# Altium PCB L50T-TEST.PcbDoc (part 2 of 2)
Units mm, origin at the board's own origin, x right, y up, seen from the top; angles counter-clockwise.
Board outline 174.25 x 233.6 mm, 2 copper layers (Top Layer, Bottom Layer); 176 components, 146 nets, 565 pads, 293 vias.
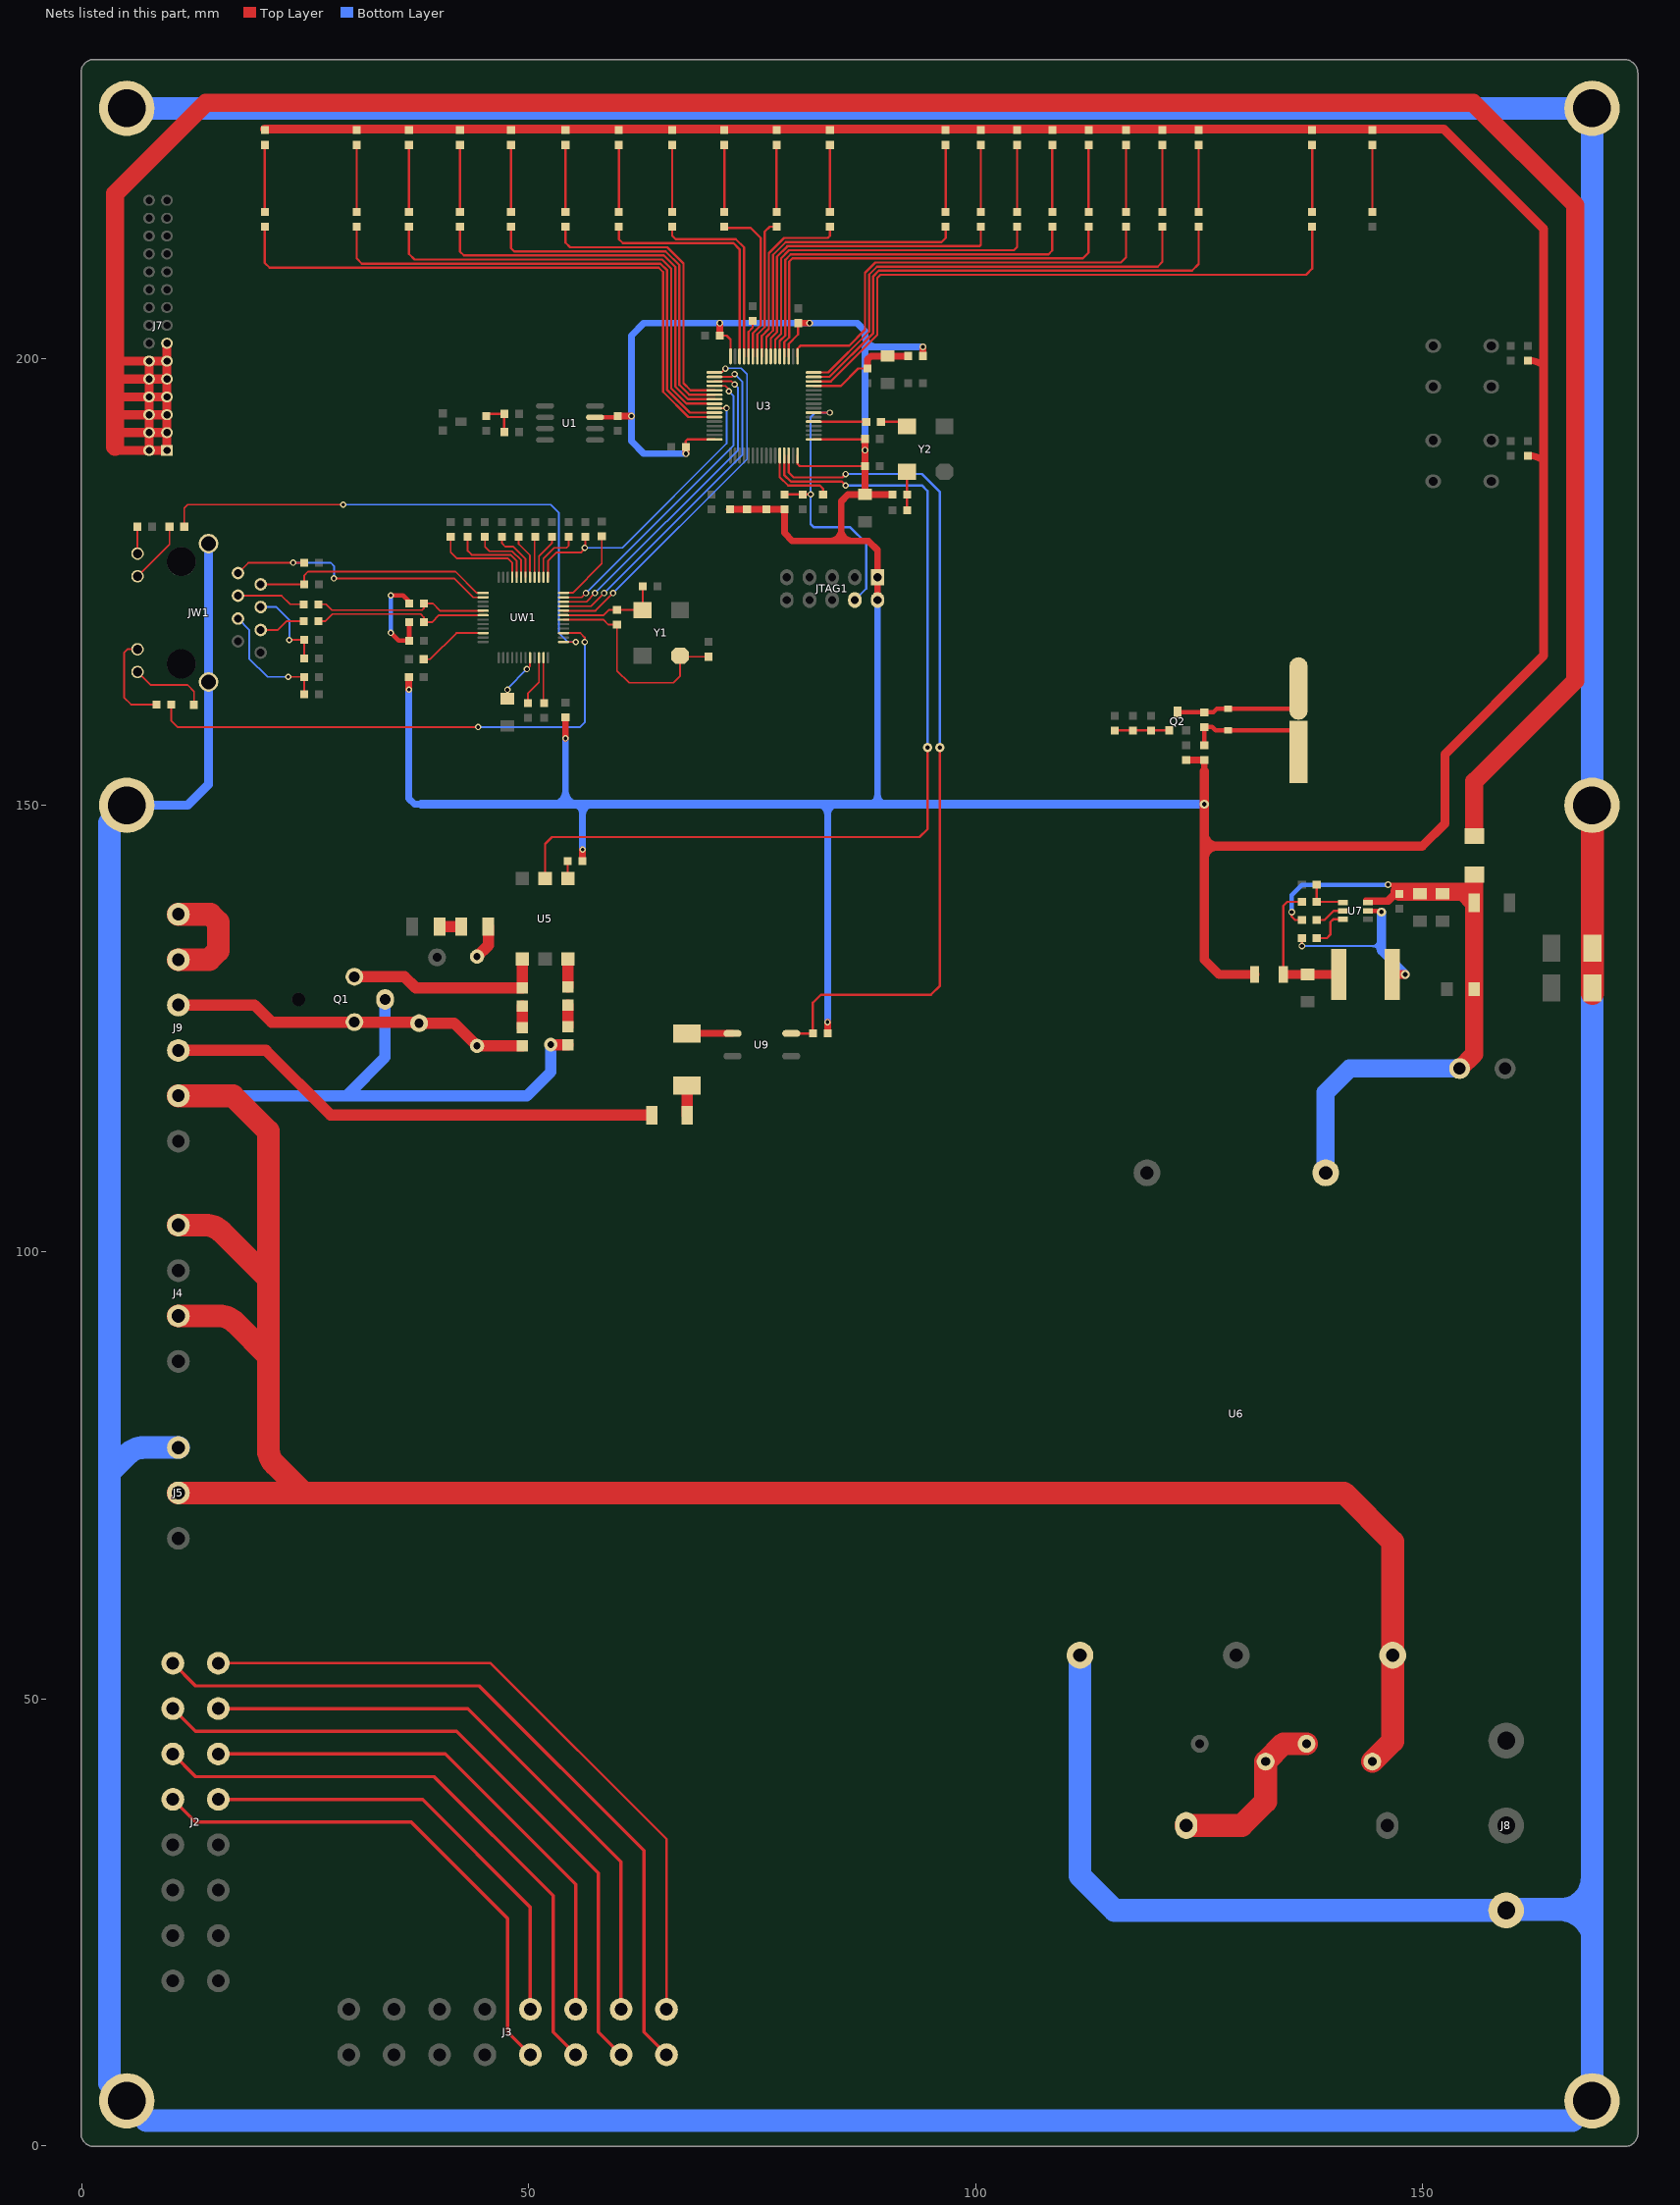
[diagram p2: the nets of this part, all layers, seen from the top]

## Via types
v1: diameter 0.762, hole 0.457, Top Layer to Bottom Layer, tented both sides, 242 vias
v2: diameter 0.711, hole 0.406, Top Layer to Bottom Layer, tented both sides, 44 vias
v3: diameter 1.016, hole 0.508, Top Layer to Bottom Layer, tented both sides, 5 vias
v4: diameter 1.524, hole 0.762, Top Layer to Bottom Layer, tented both sides, 2 vias

## Nets (pads, with @x,y where several pads share a name; then routed paths per layer and width w, separated by ;. In a path a pad name is that pad's centre, name@x,y a point inside that pad or via, vN(x,y) a via of type N, cw(c..) or ccw(c..) an arc to the next point about the centre after c; other vN are vias at no path point) (continued)
L5A: J2.10 J3.8 | length 59.3
  Top Layer w0.381: J2.10@10.16,38.735 12.7,36.195 36.83,36.195 47.625,25.4 47.625,12.7 J3.8@50.165,10.16
L5B: J2.9 J3.7 | length 51.4
  Top Layer w0.381: J2.9@15.24,38.735 38.1,38.735 50.165,26.67 J3.7@50.165,15.24
L6A: J2.12 J3.6 | length 68
  Top Layer w0.381: J2.12@10.16,43.815 12.7,41.275 39.37,41.275 52.705,27.94 52.705,12.7 J3.6@55.245,10.16
L6B: J2.11 J3.5 | length 60
  Top Layer w0.381: J2.11@15.24,43.815 40.64,43.815 55.245,29.21 J3.5@55.245,15.24
L7A: J2.14 J3.4 | length 76.6
  Top Layer w0.381: J2.14@10.16,48.895 12.7,46.355 41.91,46.355 57.785,30.48 57.785,12.7 J3.4@60.325,10.16
L7B: J2.13 J3.3 | length 68.7
  Top Layer w0.381: J2.13@15.24,48.895 43.18,48.895 60.325,31.75 J3.3@60.325,15.24
L8A: J2.16 J3.2 | length 85.3
  Top Layer w0.381: J2.16@10.16,53.975 12.7,51.435 44.45,51.435 62.865,33.02 62.865,12.7 J3.2@65.405,10.16
L8B: J2.15 J3.1 | length 77.4
  Top Layer w0.254: J2.15@15.24,53.975 45.72,53.975 65.405,34.29 J3.1@65.405,15.24
LED1: R11.1 U3.42 | length 58.6
  Top Layer w0.254: R11.1@30.734,214.757 30.734,211.201 31.318,210.617 64.731,210.617 65.481,209.866 65.481,196.473 68.014,193.941 U3.42@70.777,193.941
LED2: R12.1 U3.40 | length 52
  Top Layer w0.254: R12.1@36.576,214.757 36.576,211.709 37.211,211.074 64.92,211.074 65.938,210.056 65.938,196.663 67.66,194.941 U3.40@70.777,194.941
LED3: R13.1 U3.39 | length 46
  Top Layer w0.254: R13.1@42.291,214.757 42.291,211.963 42.723,211.531 65.11,211.531 66.396,210.245 66.396,196.852 67.807,195.441 U3.39@70.777,195.441
LED4: R14.1 U3.38 | length 39.8
  Top Layer w0.254: R14.1@48.006,214.757 48.006,212.344 48.362,211.988 65.299,211.988 66.853,210.435 66.853,197.042 67.953,195.941 U3.38@70.777,195.941
LED5: R15.1 U3.37 | length 33.1
  Top Layer w0.254: R15.1@54.102,214.757 54.102,212.979 54.635,212.446 65.488,212.446 67.31,210.624 67.31,197.231 68.1,196.441 U3.37@70.777,196.441
LED6: R16.1 U3.30 | length 27.4
  Top Layer w0.254: R16.1@60.071,214.757 60.071,213.36 60.528,212.903 72.898,212.903 73.577,212.224 U3.30@73.577,200.241
LED7: R17.1 U3.29 | length 21.8
  Top Layer w0.254: R17.1@66.04,214.757 66.04,213.741 66.421,213.36 73.152,213.36 74.077,212.435 U3.29@74.077,200.241
LED8: R18.1 U3.27 | length 18.2
  Top Layer w0.254: R18.1@71.882,214.757 72.009,214.63 74.803,214.63 75.946,213.487 75.946,203.708 75.077,202.839 U3.27@75.077,200.241
LED9: R19.1 U3.26 | length 15.9
  Top Layer w0.254: U3.26@75.577,200.241 75.577,202.692 76.403,203.519 76.403,214.198 76.962,214.757 R19.1@77.724,214.757
LED10: R20.1 U3.25 | length 20.5
  Top Layer w0.254: U3.25@76.077,200.241 76.077,202.546 76.86,203.329 76.86,211.792 78.555,213.487 83.439,213.487 83.693,213.741 R20.1@83.693,214.757
LED_COU: R24.1 U3.23 | length 36.8
  Top Layer w0.254: U3.23@77.077,200.241 77.077,202.253 77.775,202.95 77.775,211.414 78.934,212.573 100.432,212.573 100.584,212.725 R24.1@100.584,214.757
LED_CPU: R23.1 U3.24 | length 33
  Top Layer w0.254: U3.24@76.577,200.241 76.577,202.399 77.318,203.14 77.318,211.603 78.744,213.03 96.19,213.03 96.647,213.487 R23.1@96.647,214.757
LED_DET: R27.1 U3.20 | length 47.7
  Top Layer w0.254: U3.20@78.577,200.241 78.577,201.813 79.146,202.382 79.146,210.845 79.502,211.201 112.014,211.201 112.649,211.836 R27.1@112.649,214.757
LED_IOU: R28.1 U3.17 | length 49.2
  Top Layer w0.254: U3.17@80.077,200.241 80.077,201.108 80.391,201.422 85.84,201.422 87.63,203.212 87.63,209.585 88.789,210.744 116.256,210.744 116.84,211.328 R28.1@116.84,214.757 R28.1@116.713,214.63
LED_MAU: R29.1 U3.16 | length 51.8
  Top Layer w0.254: U3.16@81.877,198.441 83.506,198.441 88.087,203.022 88.087,209.395 88.978,210.287 120.371,210.287 120.904,210.82 R29.1@120.904,214.757
LED_MFU: R30.1 U3.15 | length 56.2
  Top Layer w0.254: U3.15@81.877,197.941 83.653,197.941 88.544,202.833 88.544,209.206 89.168,209.829 124.231,209.829 124.968,210.566 R30.1@124.968,214.757
LED_OK: R38.1 U3.43 | length 69.6
  Top Layer w0.254: R38.1@20.32,214.63 R38.1@20.447,214.757 20.447,210.693 20.98,210.16 64.541,210.16 65.024,209.677 65.024,196.284 67.867,193.441 U3.43@70.777,193.441
LED_PDU: R26.1 U3.21 | length 44
  Top Layer w0.254: U3.21@78.077,200.241 78.077,201.96 78.689,202.572 78.689,211.035 79.313,211.658 108.153,211.658 108.585,212.09 R26.1@108.585,214.757
LED_RUN: R37.1 U3.14 | length 69.4
  Top Layer w0.254: U3.14@81.877,197.441 83.799,197.441 89.002,202.643 89.002,209.017 89.357,209.372 136.982,209.372 137.668,210.058 R37.1@137.668,214.757
LED_SSU: R25.1 U3.22 | length 40.5
  Top Layer w0.254: U3.22@77.577,200.241 77.577,202.106 78.232,202.761 78.232,211.224 79.123,212.115 104.292,212.115 104.648,212.471 R25.1@104.648,214.757
MFU_Control: U3.61 U5.2 | length 104.2
  Top Layer w0.254: U5.2@51.816,141.787 51.816,145.669 52.578,146.431 93.726,146.431 94.615,147.32 v3(94.615,156.464) ; U3.61@78.577,189.141 78.577,186.98 79.324,186.233 85.039,186.233 v2(85.471,185.801)
  Bottom Layer w0.254: v2(85.471,185.801) 93.98,185.801 94.615,185.166 v3(94.615,156.464)
MFU_EN: C12.2 J9.4 Q1.1 R35.2 RV1.2 | length 40.4
  Top Layer w1.27: J9.4@10.77,127.635 19.304,127.635 21.209,125.73 Q1.1@30.48,125.73 37.592,125.73 RV1.2@37.719,125.603 41.656,125.603 C12.2@44.196,123.063 R35.2@49.276,123.063
MFU_WORK: D6.2 J9.3 | length 56
  Top Layer w1.27: J9.3@10.77,122.555 20.574,122.555 27.813,115.316 D6.2@63.754,115.316
MFU_WORK_C: R42.2 U3.62 U9.4 | length 96.2
  Top Layer w0.254: U3.62@79.077,189.141 79.077,187.242 79.629,186.69 85.09,186.69 v2(85.471,187.071) ; U9.4@79.375,124.46 R42.2@81.788,124.46 81.788,127.889 82.677,128.778 94.996,128.778 96.012,129.794 v3(96.012,156.464)
  Bottom Layer w0.254: v2(85.471,187.071) 93.98,187.071 96.012,185.039 v3(96.012,156.464)
nACTLED: RW16.2 UW1.27 | length 60.7
  Top Layer w0.203: RW16.2@9.957,161.265 9.957,159.461 10.668,158.75 v2(44.323,158.75) ; UW1.27@53.882,169.272 55.772,169.272 56.261,168.783 v2(56.261,168.275)
  Bottom Layer w0.203: v2(44.323,158.75) 55.753,158.75 56.261,159.258 v2(56.261,168.275)
NET0_LED1: JW1.11 RW16.1 | length 10.6
  Top Layer w0.203: JW1.11@6.2,167.456 5.074,167.456 4.699,167.081 4.699,162.052 5.486,161.265 RW16.1@8.306,161.265
NET0_LED2: JW1.10 RW17.1 | length 7
  Top Layer w0.203: JW1.10@6.2,175.626 9.779,179.205 RW17.1@9.779,181.178
NET_MISO: U3.35 UW1.34 | length 36.6
  Top Layer w0.203: UW1.34@53.882,172.772 56.44,172.772 v2(57.404,173.736) ; U3.35@70.777,197.441 72.688,197.441 v2(73.025,197.104)
  Bottom Layer w0.203: v2(57.404,173.736) 73.406,189.738 73.406,196.723 v2(73.025,197.104) v2@73.025,196.977
NET_MOSI: U3.36 UW1.35 | length 34.3
  Top Layer w0.203: UW1.35@53.882,173.272 55.924,173.272 v2(56.388,173.736) ; U3.36@70.777,196.941 72.009,196.941 72.39,196.56 v2(72.39,196.342)
  Bottom Layer w0.203: v2(56.388,173.736) 72.898,190.246 72.898,195.834 v2(72.39,196.342)
NET_NSCLK: U3.34 UW1.33 | length 38.8
  Top Layer w0.203: UW1.33@53.882,172.272 56.956,172.272 v2(58.42,173.736) ; U3.34@70.777,197.941 72.719,197.941 v2(73.025,198.247)
  Bottom Layer w0.203: v2(58.42,173.736) 73.914,189.23 73.914,197.358 v2(73.025,198.247)
NET_NSS: U3.33 UW1.32 | length 41.2
  Top Layer w0.203: UW1.32@53.882,171.772 57.472,171.772 v2(59.436,173.736) ; U3.33@70.777,198.441 71.568,198.441 v2(72.009,198.882)
  Bottom Layer w0.203: v2(59.436,173.736) 74.422,188.722 74.422,198.247 73.762,198.907 72.034,198.907 v2(72.009,198.882)
NetC2_2: C2.2 R3.2 R4.1 | length 4.2
  Top Layer w0.254: C2.2@45.212,193.548 45.466,193.802 R4.1@47.244,193.802 R3.2@47.244,191.77
NetC10_1: C10.1 FB5.1 Y2.4 | length 4.3
  Top Layer w0.254: C10.1@92.329,183.007 FB5.1@92.329,184.785 Y2.4@92.329,187.325
NetC12_1: C12.1 R33.2 | length 3.9
  Top Layer w1.27: C12.1@44.196,133.063 45.466,134.333 R33.2@45.466,136.398
NetC17_2: C17.2 Q2.1 R36.2 R41.2 | length 6.1
  Top Layer w0.254: R36.2@115.568,158.369 R41.2@117.6,158.369 C17.2@119.632,158.369 Q2.1@121.664,158.369
NetC18_1: C18.1 D3.2 R40.1 U8.1 | length 14.8
  Top Layer w0.508: R40.1@125.601,156.718 C18.1@125.601,158.75 126.492,158.75 126.873,158.369 D3.2@128.27,158.369 135.509,158.369 136.144,157.734 U8.1@136.144,155.956
NetC18_2: C18.2 D3.1 Q2.3 U8.2 | length 15.6
  Top Layer w0.508: Q2.3@122.604,160.401 C18.2@125.601,160.401 126.619,160.401 127,160.782 D3.1@128.27,160.782 135.509,160.782 136.144,161.417 U8.2@136.144,163.068
NetC19_1: C19.1 L1.1 U7.2 | length 22.9
  Top Layer w0.254: v1(136.525,134.239) C19.1@136.525,135.128
  Top Layer w0.508: U7.2@143.894,138.176 145.288,138.176 v3(145.415,138.049)
  Top Layer w1.016: L1.1@146.637,131.064 v3(148.082,131.064)
  Bottom Layer w0.254: v1(136.525,134.239) 144.399,134.239 ; 145.034,133.731 ccw(c144.494,133.699) 144.526,134.239 ; 145.034,134.747 cw(c144.463,134.811) 144.526,134.239 ; 145.415,133.731 144.907,134.239 144.526,134.239 ; 144.399,134.239 ccw(c144.463,134.811) 144.526,134.239 ; 144.399,134.239 144.463,134.239 ; 144.463,134.239 cw(c144.494,133.699) 144.526,134.239 ; 144.463,134.239 144.526,134.239
  Bottom Layer w1.016: v3(145.415,138.049) 145.415,133.731 v3(148.082,131.064)
NetC19_2: C19.2 U7.6 | length 4.6
  Top Layer w0.254: C19.2@138.176,135.128 139.319,135.128 139.7,135.509 139.7,136.906 140.02,137.226 U7.6@141.094,137.226
NetC22_2: C22.2 F2.1 L1.2 R43.1 | length 16.2
  Top Layer w0.254: F2.1@134.442,131.064 134.442,138.76 134.874,139.192 R43.1@136.525,139.192
  Top Layer w1.016: F2.1@134.442,131.064 C22.2@137.16,131.064 L1.2@140.637,131.064
NetCW1_1: CW1.1 UW1.20 | length 5.6
  Top Layer w0.203: CW1.1@47.6,161.925 v2(47.6,162.916) ; v2(49.784,165.227) 50.132,165.575 UW1.20@50.132,166.522
  Bottom Layer w0.203: v2(47.6,162.916) 47.6,163.043 v2(49.784,165.227)
NetCW2_1: CW2.1 UW1.22 | length 5.6
  Top Layer w0.203: CW2.1@49.911,161.417 49.911,162.56 51.132,163.781 UW1.22@51.132,166.522
NetCW3_2: CW3.2 RW10.2 UW1.30 Y1.1 | length 24.8
  Top Layer w0.178: Y1.1@66.929,166.751 67.056,166.624 CW3.2@70.104,166.624
  Top Layer w0.203: UW1.30@53.882,170.772 58.336,170.772 58.903,170.205 RW10.2@59.868,170.205 59.868,165.049 61.214,163.703 66.167,163.703 66.929,164.465 Y1.1@66.929,166.751
NetCW4_2: CW4.2 RW10.1 UW1.31 Y1.3 | length 11.8
  Top Layer w0.203: UW1.31@53.882,171.272 58.369,171.272 58.953,171.856 RW10.1@59.868,171.856 Y1.3@62.704,171.856 ; Y1.3@62.729,171.831 Y1.3@62.704,171.856 ; CW4.2@62.738,174.498 62.738,171.891 Y1.3@62.704,171.856
NetCW5_1: CW5.1 RW15.1 RW19.1 | length 11.2
  Top Layer w0.508: v2(34.544,169.291) 35.408,168.427 CW5.1@36.601,168.427 RW15.1@36.601,170.485 ; v2(34.544,173.482) 35.941,173.482 36.601,172.822 RW19.1@36.601,172.593
  Bottom Layer w0.508: v2(34.544,169.291) v2(34.544,173.482)
NetCW6_1: CW6.1 JW1.3 | length 7.8
  Top Layer w0.203: JW1.3@17.45,173.451 22.332,173.451 23.292,172.491 CW6.1@24.816,172.491
NetCW7_1: CW7.1 JW1.6 | length 5.2
  Top Layer w0.203: JW1.6@19.99,169.621 21.895,169.621 22.885,170.612 CW7.1@24.816,170.612
NetCW8_1: CW8.1 JW1.5 RW22.2 | length 13.9
  Top Layer w0.203: v2(23.063,164.363) CW8.1@24.841,164.363 RW22.2@24.841,162.433
  Bottom Layer w0.203: JW1.5@17.45,170.891 18.694,169.647 18.694,166.421 20.752,164.363 v2(23.063,164.363)
NetCW9_1: CW9.1 JW1.4 RW20.2 | length 9.8
  Top Layer w0.203: v2(23.19,168.504) RW20.2@24.841,168.504 CW9.1@24.841,166.421
  Bottom Layer w0.203: JW1.4@19.99,172.181 21.748,172.181 23.19,170.739 v2(23.19,168.504)
NetD6_1: D6.1 R45.1 | length 3.3
  Top Layer w1.27: R45.1@67.691,118.618 67.714,118.595 D6.1@67.714,115.316
NetF1_2: F1.2 RT1.1 RV2.2 | length 19.9
  Top Layer w2.54: F1.2@123.571,35.814 129.794,35.814 132.461,38.481 RV2.2@132.461,42.958 134.461,44.958 RT1.1@137.033,44.958
NetJ9_5: J9.5 J9.6 | length 12.9
  Top Layer w2.54: J9.5@10.77,132.715 14.224,132.715 15.24,133.731 15.24,136.906 14.351,137.795 J9.6@10.77,137.795
NetJW1_9: JW1.9 RW23.2 | length 3
  Top Layer w0.203: RW23.2@6.198,181.178 6.2,181.176 JW1.9@6.2,178.166
NetJW1_12: JW1.12 RW21.2 | length 8.7
  Top Layer w0.203: JW1.12@6.2,164.916 7.642,163.474 11.786,163.474 12.522,162.738 RW21.2@12.522,161.239
NetLED1_2: LED1.2 R11.2 | length 7.5
  Top Layer w0.254: R11.2@30.734,216.408 LED1.2@30.734,223.901
NetLED2_2: LED2.2 R12.2 | length 7.5
  Top Layer w0.254: R12.2@36.576,216.408 LED2.2@36.576,223.901
NetLED3_2: LED3.2 R13.2 | length 7.5
  Top Layer w0.254: R13.2@42.291,216.408 LED3.2@42.291,223.901
NetLED4_2: LED4.2 R14.2 | length 7.5
  Top Layer w0.254: R14.2@48.006,216.408 LED4.2@48.006,223.901
NetLED5_2: LED5.2 R15.2 | length 7.5
  Top Layer w0.254: R15.2@54.102,216.408 LED5.2@54.102,223.901
NetLED6_2: LED6.2 R16.2 | length 7.5
  Top Layer w0.254: R16.2@60.071,216.408 LED6.2@60.071,223.901
NetLED7_2: LED7.2 R17.2 | length 7.5
  Top Layer w0.254: R17.2@66.04,216.408 LED7.2@66.04,223.901
NetLED8_2: LED8.2 R18.2 | length 7.5
  Top Layer w0.254: R18.2@71.882,216.408 LED8.2@71.882,223.901
NetLED9_2: LED9.2 R19.2 | length 7.5
  Top Layer w0.254: R19.2@77.724,216.408 LED9.2@77.724,223.901
NetLED10_2: LED10.2 R20.2 | length 7.5
  Top Layer w0.254: R20.2@83.693,216.408 LED10.2@83.693,223.901
NetLED11_2: LED11.2 R23.2 | length 7.5
  Top Layer w0.254: R23.2@96.647,216.408 LED11.2@96.647,223.901
NetLED12_2: LED12.2 R24.2 | length 7.5
  Top Layer w0.254: R24.2@100.584,216.408 LED12.2@100.584,223.901
NetLED13_2: LED13.2 R25.2 | length 7.5
  Top Layer w0.254: R25.2@104.648,216.408 LED13.2@104.648,223.901
NetLED14_2: LED14.2 R26.2 | length 7.5
  Top Layer w0.254: R26.2@108.585,216.408 LED14.2@108.585,223.901
NetLED15_2: LED15.2 R27.2 | length 7.5
  Top Layer w0.254: R27.2@112.649,216.408 LED15.2@112.649,223.901
NetLED16_2: LED16.2 R28.2 | length 7.5
  Top Layer w0.254: R28.2@116.84,216.408 LED16.2@116.84,223.901
NetLED17_2: LED17.2 R29.2 | length 7.5
  Top Layer w0.254: R29.2@120.904,216.408 LED17.2@120.904,223.901
NetLED18_2: LED18.2 R30.2 | length 7.5
  Top Layer w0.254: R30.2@124.968,216.408 LED18.2@124.968,223.901
NetLED19_2: LED19.2 R37.2 | length 7.5
  Top Layer w0.254: R37.2@137.668,216.408 LED19.2@137.668,223.901
NetLED20_2: LED20.2 R38.2 | length 7.5
  Top Layer w0.254: R38.2@20.447,216.408 LED20.2@20.447,223.901
NetLED21_2: LED21.2 R48.2 | length 7.5
  Top Layer w0.254: R48.2@144.399,216.408 LED21.2@144.399,223.901
NetQ1_3: Q1.3 R32.1 U5.4 | length 22.6
  Top Layer w1.27: Q1.3@30.48,130.81 36.068,130.81 37.338,129.54 R32.1@49.276,129.54 U5.4@49.276,132.787
NetR1_1: R1.1 U3.60 | length 8.4
  Top Layer w0.254: U3.60@78.077,189.141 78.077,186.718 79.019,185.776 82.575,185.776 82.931,185.42 R1.1@82.931,184.785
NetR9_2: R9.2 Y2.3 | length 3.1
  Top Layer w0.254: R9.2@89.408,192.913 91.821,192.913 Y2.3@92.329,192.405
NetR21_2: R21.2 U5.1 | length 2
  Top Layer w0.254: U5.1@54.356,141.787 R21.2@54.356,143.764
NetR22_2: R22.2 R33.1 | length 2.4
  Top Layer w1.27: R22.2@40.005,136.398 R33.1@42.418,136.398
NetR31_1: R31.1 U5.6 | length 3.1
  Top Layer w1.27: R31.1@54.356,129.667 U5.6@54.356,132.787
NetR31_2: R31.2 R34.1 | length 2.4
  Top Layer w1.27: R34.1@54.356,125.222 R31.2@54.356,127.635
NetR32_2: R32.2 R35.1 | length 2.4
  Top Layer w1.27: R35.1@49.276,125.095 R32.2@49.276,127.508
NetR39_1: R39.1 U7.5 | length 3.3
  Top Layer w0.254: R39.1@138.176,137.16 139.065,137.16 140.081,138.176 U7.5@141.094,138.176
NetR43_2: R43.2 R44.1 U7.4 | length 4.9
  Top Layer w0.254: R44.1@138.176,141.097 R43.2@138.176,139.192 141.028,139.192 cw(c141.028,139.126) U7.4@141.094,139.126
NetR45_2: R45.2 U9.1 | length 5.1
  Top Layer w0.762: R45.2@67.691,124.46 U9.1@72.796,124.46
NetRW1_1: RW1.1 UW1.10 | length 7.9
  Top Layer w0.203: RW1.1@38.227,166.345 38.964,166.345 41.891,169.272 UW1.10@44.882,169.272
NetRW2_1: RW2.1 UW1.23 | length 5.1
  Top Layer w0.203: UW1.23@51.632,166.522 51.632,161.474 RW2.1@51.689,161.417
NetRW3_2: RW3.2 UW1.42 | length 6.2
  Top Layer w0.203: RW3.2@46.99,180.061 46.99,179.324 47.371,178.943 48.26,178.943 49.632,177.571 UW1.42@49.632,175.522
NetRW4_2: RW4.2 UW1.41 | length 5.1
  Top Layer w0.203: RW4.2@48.853,180.061 48.853,179.239 50.132,177.96 UW1.41@50.132,175.522
NetRW5_2: RW5.2 UW1.40 | length 4.6
  Top Layer w0.203: UW1.40@50.632,175.522 50.632,179.977 RW5.2@50.715,180.061
NetRW6_2: RW6.2 UW1.39 | length 5.1
  Top Layer w0.203: UW1.39@51.132,175.522 51.132,177.878 52.578,179.324 RW6.2@52.578,180.061
NetRW7_2: RW7.2 UW1.38 | length 6.5
  Top Layer w0.203: UW1.38@51.632,175.522 51.632,177.616 52.832,178.816 54.229,178.816 54.458,179.045 RW7.2@54.458,180.061
NetRW9_1: RW9.1 UW1.36 | length 8.7
  Top Layer w0.203: UW1.36@53.882,173.772 54.9,173.772 58.166,177.038 RW9.1@58.166,180.086
NetRW11_1: RW11.1 UW1.45 | length 10.7
  Top Layer w0.203: RW11.1@41.25,180.061 41.25,178.333 41.961,177.622 47.676,177.622 48.132,177.166 UW1.45@48.132,175.522
NetRW12_1: RW12.1 UW1.44 | length 9.4
  Top Layer w0.203: RW12.1@43.155,180.061 43.155,178.46 43.586,178.029 47.965,178.029 48.632,177.361 UW1.44@48.632,175.522
NetRW13_1: RW13.1 UW1.43 | length 7.7
  Top Layer w0.203: RW13.1@45.085,180.061 45.085,178.943 45.593,178.435 48.133,178.435 49.132,177.436 UW1.43@49.132,175.522
nLINKLED: RW17.2 UW1.25 | length 61.7
  Top Layer w0.203: RW17.2@11.43,181.178 11.43,183.261 11.811,183.642 v2(29.21,183.642) ; UW1.25@53.882,168.272 55.242,168.272 v2(55.245,168.275)
  Bottom Layer w0.203: v2(29.21,183.642) 52.451,183.642 53.34,182.753 53.34,169.291 54.356,168.275 v2(55.245,168.275)
NRST: C11.2 JTAG1.4 R10.1 U3.7 | length 33
  Top Layer w0.254: R10.1@78.613,184.785 C11.2@80.645,184.785 v2(81.534,184.785) ; U3.7@81.865,193.929 U3.7@81.877,193.941 v2(83.681,193.941)
  Bottom Layer w0.254: v2(83.681,193.941) 82.054,193.941 81.534,193.421 v2(81.534,184.785) 81.534,181.483 81.915,181.102 85.979,181.102 87.757,179.324 87.757,174.244 JTAG1.4@86.487,172.974
OSC_IN: R9.1 U3.5 | length 5.9
  Top Layer w0.254: U3.5@81.877,192.941 87.729,192.941 R9.1@87.757,192.913
PG: C25.1 I1.1 I2.1 I3.1 I4.1 I5.1 I6.1 J5.3 J8.3 JW1.13 JW1.14 R49.1 U6.1 | length 859.9
  Top Layer w2.54: I2.1@169,150 169.037,149.963 C25.1@169.037,133.985 R49.1@169.037,129.54 R49.1@169.037,128.905
  Bottom Layer w1.016: I5.1@5,150 11.824,150 14.15,152.326 JW1.13@14.15,163.796 JW1.14@14.15,179.286
  Bottom Layer w2.54: I5.1@5,150 3.048,148.048 3.048,75.311 ; I4.1@5,228 I3.1@169,228 I2.1@169,150 169,29.972 ; J5.3@10.77,78.105 6.894,78.105 ccw(c6.894,75.565) 5.098,77.361 3.048,75.311 ; U6.1@111.685,54.864 111.685,30.174 115.545,26.314 J8.3@159.385,26.314 cw(c159.631,26.068) 159.631,26.416 165.481,26.416 ; 168.896,24.08 ccw(c165.163,22.288) 165.481,26.416 ; 3.048,75.311 3.048,6.952 I6.1@5,5 7.206,2.794 166.794,2.794 I1.1@169,5 169,26.416 ; 165.481,26.416 ccw(c165.462,29.954) 169,29.935 ; 165.481,26.416 169,26.416 ; 169,26.416 169,29.935 ; 169,29.935 ccw(c165.462,29.954) 169,29.972 ; 169,29.935 169,29.972
RD+: CW6.2 RW19.2 UW1.5 | length 19.7
  Top Layer w0.203: CW6.2@26.467,172.491 27.305,172.491 27.965,171.831 38.049,171.831 38.252,172.034 RW19.2@38.252,172.593 39.243,172.593 40.064,171.772 UW1.5@44.882,171.772
RD-: CW7.2 RW15.2 UW1.6 | length 19.8
  Top Layer w0.203: CW7.2@26.467,170.612 27.229,170.612 28.016,171.399 37.897,171.399 38.252,171.044 RW15.2@38.252,170.485 39.167,170.485 39.954,171.272 UW1.6@44.882,171.272
RST_W5500: RW8.1 U3.41 UW1.37 | length 33.9
  Top Layer w0.203: UW1.37@52.132,175.522 52.132,177.354 53.086,178.308 55.88,178.308 56.312,178.74 RW8.1@56.312,180.061 ; U3.41@70.777,194.441 72.132,194.441 v2(72.136,194.437)
  Bottom Layer w0.203: v2(56.261,178.816) 60.452,178.816 72.136,190.5 v2(72.136,194.437)
SPS12V: C13.2 C14.2 C16.1 C20.1 C21.1 D4.2 D5.1 R39.2 U6.8 U7.3 | length 80.1
  Top Layer w0.254: v1(135.382,138.049) 135.382,137.541 135.763,137.16 R39.2@136.525,137.16
  Top Layer w0.508: 143.637,139.446 146.05,139.446 146.685,140.081 C16.1@147.193,140.081 ; U7.3@143.894,139.126 146.238,139.126 C16.1@147.193,140.081 ; v1(146.177,141.097) 147.574,141.097 ; C16.1@147.447,140.081 C16.1@147.193,140.081 ; C16.1@147.447,140.335 C16.1@147.193,140.081
  Top Layer w2.032: C16.1@147.447,140.335 154.536,140.335 D4.2@155.806,139.065 ; C21.1@154.178,120.523 155.806,122.151 C20.1@155.806,129.413 D4.2@155.806,139.065 ; D5.1@155.829,141.478 155.806,141.455 D4.2@155.806,139.065
  Bottom Layer w0.508: v1(135.382,138.049) 135.382,139.954 136.525,141.097 v1(146.177,141.097)
  Bottom Layer w2.032: U6.8@139.185,108.864 139.185,117.849 141.859,120.523 C21.1@154.178,120.523
SPS_12V: D5.2 J7.1 J7.2 J7.3 J7.4 J7.5 J7.6 J7.7 J7.8 J7.9 J7.10 J7.11 J7.12 J7.13 | length 333.1
  Top Layer w1.016: 3.683,190.119 3.683,189.865 3.841,189.707 J7.2@7.493,189.707 ; 3.683,191.77 3.746,191.707 J7.4@7.493,191.707 ; 3.683,193.675 3.715,193.707 J7.6@7.493,193.707 ; 3.683,195.834 3.81,195.707 J7.8@7.493,195.707 ; 3.683,197.739 3.715,197.707 J7.10@7.493,197.707 ; 3.683,199.771 3.747,199.707 J7.12@7.493,199.707 ; J7.13@9.493,201.707 J7.11@9.493,199.707 ; J7.2@7.493,189.707 J7.4@7.493,191.707 ; J7.2@7.493,189.707 J7.1@9.493,189.707 J7.3@9.493,191.707 ; J7.4@7.493,191.707 J7.6@7.493,193.707 ; J7.4@7.493,191.707 J7.3@9.493,191.707 ; J7.6@7.493,193.707 J7.8@7.493,195.707 ; J7.6@7.493,193.707 J7.5@9.493,193.707 ; J7.8@7.493,195.707 J7.10@7.493,197.707 ; J7.8@7.493,195.707 J7.7@9.493,195.707 ; J7.10@7.493,197.707 J7.12@7.493,199.707 ; J7.10@7.493,197.707 J7.9@9.493,197.707 ; J7.12@7.493,199.707 J7.11@9.493,199.707 ; J7.3@9.493,191.707 J7.5@9.493,193.707 ; J7.5@9.493,193.707 J7.7@9.493,195.707 ; J7.7@9.493,195.707 J7.9@9.493,197.707 ; J7.9@9.493,197.707 J7.11@9.493,199.707
  Top Layer w2.032: 3.683,190.119 3.683,191.77 3.683,193.675 3.683,195.834 3.683,197.739 3.683,199.771 3.683,218.44 13.843,228.6 155.702,228.6 167.132,217.17 167.132,163.957 155.829,152.654 D5.2@155.829,146.812
SRST: R2.2 U3.28 | length 4.2
  Top Layer w0.254: U3.28@74.577,200.241 74.577,202.986 75.057,203.466 R2.2@75.057,204.216
SYS_PWR: J4.2 J4.4 J5.2 J9.2 Q1.2 R34.2 RT1.2 U6.3 | length 302
  Top Layer w1.27: v4(52.451,123.19) R34.2@54.356,123.19
  Top Layer w2.54: J5.2@10.77,73.025 24.765,73.025 ; J4.2@10.77,92.837 15.331,92.837 cw(c15.331,90.297) 17.127,92.093 20.828,88.392 ; J4.4@10.77,102.997 13.807,102.997 cw(c13.807,100.457) 15.603,102.253 20.828,97.028 ; J9.2@10.77,117.475 16.891,117.475 20.828,113.538 20.828,97.028 ; RT1.2@144.399,42.958 146.685,45.244 U6.3@146.685,54.864 146.685,67.564 141.224,73.025 24.765,73.025 ; 20.828,88.392 20.828,97.028 ; 20.828,88.392 20.828,78.014 ccw(c23.368,78.014) 21.572,76.218 24.765,73.025
  Bottom Layer w1.27: J9.2@10.77,117.475 29.591,117.475 ; Q1.2@33.909,128.27 33.909,121.793 29.591,117.475 ; v4(52.451,123.19) 52.451,120.142 49.784,117.475 29.591,117.475
TD+: JW1.1 RW14.1 UW1.2 | length 31.6
  Top Layer w0.203: JW1.1@17.45,175.991 18.598,177.14 v2(23.622,177.14) RW14.1@24.867,177.14 ; v2(28.194,175.387) 41.656,175.387 43.771,173.272 UW1.2@44.882,173.272
  Bottom Layer w0.203: v2(23.622,177.14) 27.838,177.14 28.194,176.784 v2(28.194,175.387)
TD-: JW1.2 RW18.1 UW1.1 | length 27.1
  Top Layer w0.203: JW1.2@19.99,174.721 24.861,174.721 RW18.1@24.867,174.727 24.867,175.743 25.273,176.149 41.783,176.149 44.16,173.772 UW1.1@44.882,173.772
V3.3: C1.1 C5.2 C15.1 CU3.2 CU4.2 CU5.2 CU6.2 CU7.2 F2.2 FB1.1 FB2.1 FB3.1 FB5.2 JTAG1.1 JTAG1.2 LED1.1 LED2.1 LED3.1 LED4.1 LED5.1 LED6.1 LED7.1 LED8.1 LED9.1 LED10.1 LED11.1 LED12.1 LED13.1 LED14.1 LED15.1 LED16.1 LED17.1 LED18.1 LED19.1 LED20.1 LED21.1 R5.2 R6.2 R7.2 R10.2 R21.1 R40.2 R42.1 R46.1 R47.1 U1.3 U3.1 U3.19 U3.32 U3.48 U3.64 | length 613.2
  Top Layer w0.254: CU5.2@67.564,190.119 67.564,190.754 67.751,190.941 U3.48@70.777,190.941 ; CU6.2@71.374,202.565 72.136,202.565 72.577,202.124 U3.32@72.577,200.241 ; U3.19@79.077,200.241 79.077,201.632 80.137,202.692 CU7.2@80.137,203.962 ; U3.64@80.077,189.141 80.077,188.214 80.331,187.96 87.503,187.96 CU4.2@87.63,187.833 ; U3.1@81.877,190.941 CU3.2@87.563,190.941
  Top Layer w0.508: U1.3@57.404,193.421 59.817,193.421 C1.1@59.944,193.548
  Top Layer w0.762: v2(36.576,162.941) FB2.1@36.576,164.338 ; v2(54.102,157.48) FB1.1@54.102,159.829 ; R21.1@56.007,143.764 v2(56.007,145.034) ; C1.1@59.944,193.548 v1(61.468,193.548) ; v1(67.564,189.357) CU5.2@67.564,190.119 ; CU6.2@71.374,202.565 v1(71.374,203.962) ; R5.2@72.39,183.134 R5.2@72.517,183.134 R6.2@74.422,183.134 R7.2@76.581,183.134 R10.2@78.613,183.134 78.613,180.467 79.502,179.578 84.963,179.578 ; CU7.2@80.137,203.962 v1(81.407,203.962) ; R42.1@83.439,124.46 v2(83.439,125.73) ; 84.065,179.607 ccw(c83.693,180.848) 84.963,180.594 ; 85.861,179.607 cw(c86.233,180.848) 84.963,180.594 ; C5.2@87.63,184.785 85.725,184.785 84.963,184.023 84.963,180.594 ; CU3.2@87.63,191.008 v1(87.63,189.738) CU4.2@87.63,187.96 87.63,187.833 87.63,185.166 88.011,184.785 FB5.2@90.678,184.785 ; JTAG1.2@89.027,172.974 JTAG1.1@89.027,175.514 89.027,178.562 88.011,179.578 84.963,179.578 ; FB3.1@94.107,200.279 v1(94.107,201.295) ; C15.1@123.569,155.067 R40.2@125.601,155.067 125.601,153.797 ; R47.1@161.798,189.103 162.043,189.103 cw(c162.043,186.935) 163.576,188.468 ; R46.1@161.798,199.771 162.043,199.771 cw(c162.043,197.603) 163.576,199.136 ; 84.963,179.578 84.963,180.594
  Top Layer w1.016: LED20.1@20.447,225.679 48.006,225.679 152.4,225.679 163.576,214.503 163.576,199.136 163.576,188.468 163.576,166.751 152.527,155.702 152.527,147.955 149.987,145.415 126.999,145.415 ; 125.601,144.018 cw(c126.999,144.017) 126.999,145.415 ; 125.601,153.797 125.601,147.066 ; 125.603,145.415 126.999,145.415 ; 126.873,145.415 cw(c127.063,146.876) 125.601,146.687 ; F2.2@131.242,131.064 127.254,131.064 125.601,132.717 125.601,146.687 ; 125.601,146.687 cw(c127.063,146.876) 125.601,147.066 ; 125.601,146.687 125.601,147.066
  Bottom Layer w0.762: v2(36.576,162.941) 36.576,150.749 37.211,150.114 37.973,150.114 ; 52.705,150.114 ccw(c52.642,151.575) 54.102,151.511 ; v2(54.102,157.48) 54.102,151.511 ; 54.356,150.114 54.102,150.368 54.102,151.511 ; 54.991,150.114 cw(c54.927,149.034) 56.007,149.098 ; 55.499,150.114 cw(c55.562,151.575) 54.102,151.511 ; v2(56.007,145.034) 56.007,149.098 ; 56.007,148.978 cw(c57.213,148.907) 57.15,150.114 cw(c57.213,148.907) 57.277,150.114 ; 56.007,150.114 56.007,149.098 ; v1(67.564,189.357) 62.865,189.357 61.468,190.754 v1(61.468,193.548) 61.468,202.565 62.865,203.962 v1(71.374,203.962) v1(81.407,203.962) 86.741,203.962 87.63,203.073 87.63,202.562 ccw(c88.9,202.565) 88.9,201.295 ; 82.169,150.114 cw(c82.233,148.907) 82.296,150.114 cw(c82.233,148.907) 83.439,148.971 cw(c84.582,148.971) 84.582,150.114 ; v2(83.439,125.73) 83.439,149.987 ; v1(87.63,189.738) 87.63,199.898 ; 87.63,200.025 87.63,201.168 ; 87.757,201.295 88.9,201.295 ; 88.011,150.114 ccw(c88.011,151.13) 89.027,151.13 ; 89.027,150.114 89.027,151.13 ; JTAG1.2@89.027,172.974 89.027,151.13 ; 90.043,150.114 cw(c90.043,151.13) 89.027,151.13 ; 90.932,149.987 90.932,150.114 ; v1(94.107,201.295) 88.9,201.295
  Bottom Layer w1.016: 37.973,150.114 54.356,150.114 54.991,150.114 56.007,150.114 57.15,150.114 57.277,150.114 82.169,150.114 82.296,150.114 84.582,150.114 88.011,150.114 89.027,150.114 90.043,150.114 90.932,150.114 v3@125.601,150.114
  other v3: 125.603,150.114
V3.3A: CU1.1 CU2.1 FB3.2 U3.13 | length 12.6
  Top Layer w0.254: U3.13@81.877,196.941 84.927,196.941 86.868,198.882 CU1.1@87.884,198.882
  Top Layer w0.762: CU1.1@87.884,198.882 87.884,199.898 88.265,200.279 CU2.1@90.17,200.279 FB3.2@92.456,200.279
pads on no net: JW1.0 JW1.7 Q1.0 U1.5 U1.8 U3.2 U3.3 U3.4 U3.6 U3.8 U3.51 U3.52 U3.53 U3.54 U3.57 U3.58 U3.59 U5.3 U5.5 UW1.7 UW1.12 UW1.13 UW1.18 UW1.24 UW1.26 UW1.46 UW1.47 Y2.1

## Polygon pours and split planes (outlines as drawn)
DGND on Top Layer "Top Layer-No Net" (hatched 90Degree grid 0 track 0.381, pour order 1002): 47.569,165.989 54.373,165.989 54.373,174.765 54.483,174.879 54.373,174.765 45.593,174.765 45.593,166.217 45.703,166.103 45.813,165.989 47.569,165.989
DGND on Top Layer "Top Layer-No Net" (hatched 90Degree grid 0 track 0.381, pour order 1001): 71.293,188.391 71.337,188.341 80.914,188.341 80.914,200.914 81.026,201.041 69.977,201.041 69.977,188.468 70.045,188.391 71.293,188.391
DGND on Top Layer "Top Layer-No Net" (hatched 90Degree grid 0 track 0.381, remove dead copper, pour order 1016): 77.978,113.792 78.105,113.665 167.64,113.665 167.767,113.792 167.767,217.043 161.417,223.393 7.874,223.393 2.54,218.059 2.54,154.305 35.052,154.305 37.973,151.384 97.028,151.384 97.028,150.431 97.091,150.368 97.091,129.482 95.244,127.635 77.978,127.635
DGND on Bottom Layer "Top Layer-No Net" (hatched 90Degree grid 0 track 0.381, remove dead copper, pour order 1004): 77.851,113.665 167.513,113.665 167.513,217.805 166.243,219.075 156.591,228.727 156.464,228.6 11.811,228.6 3.302,220.091 2.667,219.456 2.54,219.329 2.54,177.292 2.54,154.305 36.576,154.305 36.576,150.749 37.211,150.114 37.338,149.987 83.439,149.987 83.439,125.73 77.978,120.269 77.978,119.634 77.978,120.269 77.851,120.142 77.851,113.665

## Keep-outs
Keep-Out Layer:
  lines w0.254: 0,232.105 0,1.35 ccw(c1.35,1.35) 1.35,0 172.65,0 ; 0.004,232 cw(c1.354,232) 1.354,233.35 ; 1.397,233.35 172.593,233.35 cw(c172.567,231.928) 173.99,231.902 174,1.27 ; 172.65,0.004 ccw(c172.65,1.354) 174,1.354

## Silkscreen, mask and mechanical layers (free items; w line width, h text height)
Top Overlay:
  lines w0.254: 15.621,222.377 25.273,222.377 ; 21.59,82.423 38.1,82.423 ; 21.59,88.773 38.1,88.773 100.457,88.773 ; 21.59,91.313 38.1,91.313 100.457,91.313 ; 21.59,97.917 41.275,97.917 100.457,97.917 ; 21.717,104.521 100.457,104.521 ; 21.844,101.092 100.457,101.092 ; 25.273,217.424 15.494,217.424 15.494,227.711 25.273,227.711 25.273,217.551 ; 33.528,220.726 33.528,227.711 ; 38.1,101.092 38.1,82.423 ; 39.497,220.726 39.497,227.711 ; 45.212,227.711 45.339,227.711 45.339,220.853 ; 51.054,220.726 51.054,227.711 ; 57.277,220.726 57.277,227.711 ; 63.119,220.726 63.119,227.711 ; 68.961,220.853 68.961,227.711 ; 74.803,220.726 74.803,227.711 ; 80.518,220.726 80.518,227.711 ; 94.396,218.44 94.396,227.711 127.127,227.711 127.127,217.424 94.396,217.424 94.396,220.726 127.127,220.726 ; 98.587,220.726 98.587,227.711 ; 100.457,82.423 38.1,82.423 ; 100.457,85.598 38.1,85.598 21.59,85.598 ; 102.651,220.726 102.651,227.711 ; 106.715,220.726 106.715,227.711 ; 110.779,220.726 110.779,227.711 ; 114.843,220.726 114.843,227.711 ; 118.907,220.726 118.907,227.711 ; 122.971,220.726 122.971,227.711 ; 134.112,222.377 147.447,222.377 ; 141.097,227.711 141.097,217.551 ; 21.59,85.598 21.59,74.549 21.59,36.195 100.457,36.195 100.457,108.458 21.59,108.458 21.59,85.598 ; 28.067,220.726 28.067,217.424 28.194,217.424 87.249,217.424 87.249,220.726 ; 28.067,220.726 87.249,220.726 ; 28.067,220.726 28.067,227.711 87.249,227.711 87.249,220.726 ; 141.097,217.551 147.447,217.551 147.447,227.711 134.112,227.711 134.112,217.551 141.097,217.551
  text "CPU" at 95.25,221.234 h1.02
  text "COU" at 99.187,221.234 h1.02
  text "SSU" at 103.632,221.234 h1.02
  text "PDU" at 107.696,221.234 h1.02
  text "DET" at 111.76,221.234 h1.02
  text "IOU" at 116.078,221.234 h1.02
  text "MAU" at 119.634,221.234 h1.02
  text "MFU" at 123.952,221.234 h1.02
  text "测试完成" at 16.129,220.218 h2.54
  text "RUN" at 136.144,219.71 h1.02
  text "PWR" at 143.383,219.71 h1.02
  text "故障指示灯" at 49.53,218.313 h2.54
  text "待测板测试指示灯" at 101.219,218.313 h2.54
  text "指示灯" at 17.145,217.932 h2.54
  text "RESET" at 152.737,194.255 h1.02
  text "测试MFU" at 151.213,182.952 h2.03
  text "L50T单板测试辅助板" at 77.216,141.414 h5.08
  text "MFU" at 4.064,140.716 h1.27
  text "OUT" at 12.675,137.287 h1.02
  text "FUSE" at 12.675,131.953 h1.02
  text "EN" at 12.675,126.873 h1.02
  text "FLASH" at 12.675,121.92 h1.02
  text "L" at 12.675,116.967 h1.02
  text "N" at 12.675,111.887 h1.02
  text "PDU" at 4.166,105.918 h1.27
  text "测试板接口接线说明：" at 22.352,105.791 h2.54
  text "L" at 12.827,102.362 h1.02
  text "测试板接口" at 24.511,101.981 h2.54
  text "要连接的待测板接口" at 68.199,101.981 h2.54
  text "OUT和FUSE连接MFU板J2接口，其余连接MFU板J1接口" at 38.735,98.679 h2.54
  text "J9" at 27.94,98.552 h2.54
  text "N" at 12.827,97.282 h1.02
  text "J1接口(SSU板、PDU板、DET板、IOU板)" at 38.862,95.504 h2.54
  text "J7" at 27.94,93.853 h2.54
  text "J4接口(CPU板、COU板、MAU板)" at 38.481,92.329 h2.54
  text "L" at 12.827,92.202 h1.02
  text "SSU板J3接口" at 38.862,89.281 h2.54
  text "J5" at 27.94,89.154 h2.54
  text "N" at 12.827,87.122 h1.02
  text "J4" at 27.94,86.36 h2.54
  text "PDU板J4接口" at 38.862,86.233 h2.54
  text "J2" at 27.94,83.312 h2.54
  text "DET板P1接口" at 38.862,83.185 h2.54
  text "SSU" at 4.166,81.026 h1.27
  text "测试板测试流程：" at 22.352,78.994 h2.54
  text "PG" at 12.7,77.47 h1.02
  text "1、按照接线示意图连接待测板和测试板,上电测试；" at 26.67,76.327 h2.54
  text "2、测试板的蜂鸣器发出声响，并且“测试完成指示灯”亮起，待测板测试结" at 26.67,73.406 h2.54
  text "SYS_L" at 12.675,72.517 h1.02
  text "束（COU板的测试不借助测试板，COU板的“LED2”亮起，表示COU板" at 30.226,70.612 h2.54
  text "测试结束）；" at 30.099,68.072 h2.54
  text "SYS_N" at 12.7,67.183 h1.02
  text "3、记录测试结果，将测试板的故障指示灯LED1-LED10、待测板的LED、" at 26.67,65.405 h2.54
  text "待测板蜂鸣器和继电器的发声情况记录到对应的记录表中（LED亮填入" at 30.099,62.992 h2.54
  text "DET" at 4.191,62.738 h1.27
  text "√，熄灭填入×；蜂鸣器响填入√，不响填入×；继电器连续响4声填" at 30.099,60.452 h2.54
  text "入√，否则填入×）；" at 30.099,57.912 h2.54
  text "CH1" at 18.263,53.467 h1.02
  text "注意事项：" at 22.479,52.959 h2.54
  text "1、MFU板上电后，需要按下测试板的“测试MFU”按键（S2）1S，直到测" at 26.67,50.165 h2.54
  text "CH2" at 18.263,48.387 h1.02
  text "试板上的“MFU指示灯”亮起，MFU板开始测试；" at 29.972,47.752 h2.54
  text "2、SSU板测试过程中，注意听继电器的声音，连续发出4次声音，继电器" at 26.67,45.339 h2.54
  text "AC_L" at 149.86,44.577 h1.27
  text "CH3" at 18.263,43.307 h1.02
  text "电路判定OK；" at 30.099,42.672 h2.54
  text "3、MAU板测试过程中，注意听蜂鸣器是否发出声音，有声音则判定蜂鸣" at 26.67,40.132 h2.54
  text "CH4" at 18.263,38.227 h1.02
  text "器电路OK。" at 30.099,37.719 h2.54
  text "AC_N" at 149.606,34.798 h1.27
  text "CH5" at 18.263,33.147 h1.02
  text "CH6" at 18.263,28.067 h1.02
  text "PG" at 149.987,25.273 h1.27
  text "CH7" at 18.263,22.86 h1.02
  text "LOOP8" at 26.543,21.463 h1.02 r315
  text "LOOP5" at 41.275,21.463 h1.02 r315
  text "LOOP4" at 45.974,21.463 h1.02 r315
  text "LOOP3" at 51.689,21.463 h1.02 r315
  text "LOOP2" at 56.642,21.463 h1.02 r315
  text "LOOP1" at 61.976,21.463 h1.02 r315
  text "LOOP6" at 36.068,21.336 h1.02 r315
  text "LOOP7" at 31.242,20.955 h1.02 r315
  text "CH8" at 18.263,17.78 h1.02
  text "COIL" at 73.914,9.652 h1.52

## Text inside footprints (layer, text, board x,y; h text height)
U6: Top Overlay "AC-DC" at 129.968,74.74 h3 r90; Top Overlay "+V" at 140.001,102.68 h1.5 r90; Top Overlay "-V" at 119.935,102.68 h1.5 r90; Top Overlay "L" at 147.367,58.865 h1.5 r90; Top Overlay "N" at 129.968,58.865 h1.5 r90; Top Overlay "FG" at 112.315,58.357 h1.5 r90